# EAGLE board Drone-Battery Connection (EAGLE 8.4.1)
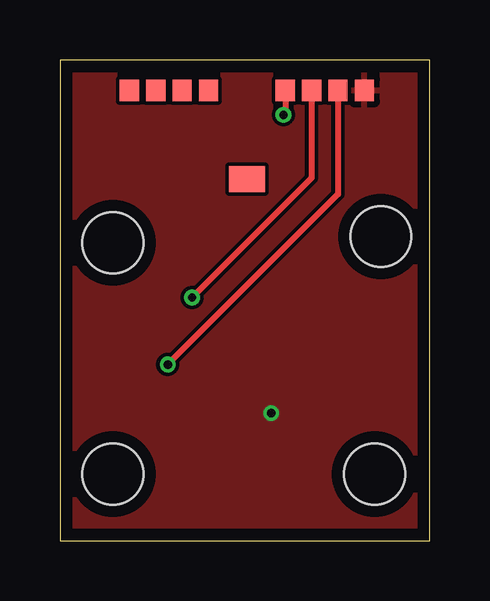
[diagram p0: board, top side]
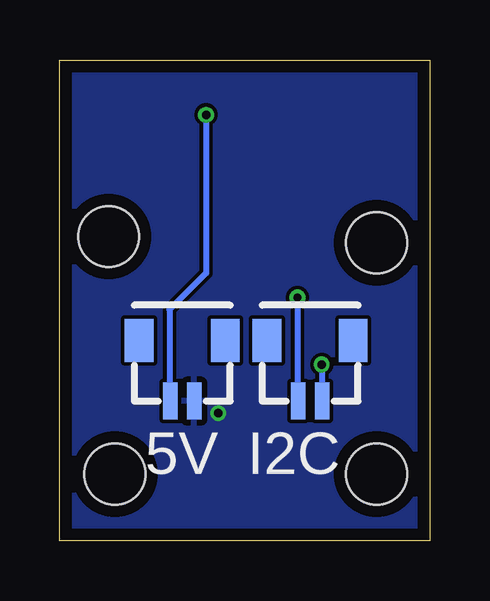
[diagram p1: board, bottom side, seen from below]

Size 15.42 x 20.06 mm. Coordinates in mm from the lower left corner, seen from the top.
Outline: 15.42,20.06 0,20.06 0,0 15.42,0 15.42,20.06
Copper layers (1*16): Top 0.035mm / dielectric 1.6mm / Bottom 0.035mm
Design rules "Elecrow_2-layer_PCB_eagle_rule": minimum track width 6mil, minimum drill 12mil, track to track 6mil, track to pad 6mil, pad to pad 6mil, via to via 8mil, smd to smd 0mil, copper to edge 20mil, drill to drill 10mil, minimum pad ring 6mil, minimum via ring 6mil, stop-mask expansion 0mil, vias tented up to drill 100mil, thermal gap 10mil
Holes 2.54 mm at 2.21,2.78 13.13,2.78 13.39,12.69 2.21,12.44

## Footprints (pad centres in the part's own frame; a part is rotated, then mirrored left to right if it is on the bottom)
SPRING_BTB_8POS_MALE = smd 0.8 x 0.9: 1 -4.9,0; 2 -3.8,0; 3 -2.7,0; 4 -1.6,0; 5 1.6,0; 6 2.7,0; 7 3.8,0; 8 4.9,0 | smd 1.5 x 1.1: P$3 0,-3.7
JST_SH_2POS = smd 0.6 x 1.55: 1 -1.5,0; 2 -0.5,0 | smd 1.2 x 1.8: P$5 -2.8,2.525; P$6 0.8,2.525

## Placement (x,y rotation side)
U$1  SPRING_BTB_8POS_MALE  [SPRING_BTB_8POS_MALE]  7.8,18.79 0 top
U$2  [JST_SH_2POS]  3.99,5.83 0 bottom
U$3  [JST_SH_2POS]  9.32,5.83 0 bottom

## Library data of the parts
U$1-U$3 = thanics_robotics

## Nets
+5V: U$1.5 U$3.1
GND: U$1.8 U$3.2
SCL: U$1.7 U$2.2
SDA: U$1.6 U$2.1

## Tracks (layer width: path | path; a pad name or v marks a point on that pad's centre or on a via)
+5V  (via drill 0.35)
  Top 0.254: U$1.5 9.4,17.85 v9.32,17.77
  Bottom 0.254: v9.32,17.77 9.32,11.17 10.85,9.64 10.85,5.86 U$3.1
GND  (via drill 0.35)
  other vias: 8.81,5.32
  pour Bottom: 15.42,-0.01 -0.08,-0.01 -0.08,21.33 15.42,21.33
  pour Top: 15.42,-0.01 -0.08,-0.01 -0.08,21.33 15.42,21.33
SCL  (via drill 0.35)
  Top 0.254: U$1.7 11.6,14.46 v4.5,7.36
  Bottom 0.254: v4.5,7.36 U$2.2
SDA  (via drill 0.35)
  Top 0.254: U$1.6 10.5,15.14 v5.51,10.15
  Bottom 0.254: v5.51,10.15 5.51,5.86 U$2.1

## Text on the board
bPlace: I2C | 5V